# Altium PCB board.PcbDoc
Units mm, origin at the board's own origin, x right, y up, seen from the top; angles counter-clockwise.
Board outline 29 x 28 mm, 2 copper layers (Top Layer, Bottom Layer), stack 0.97 mm thick; 85 components, 60 nets, 216 pads, 58 vias.
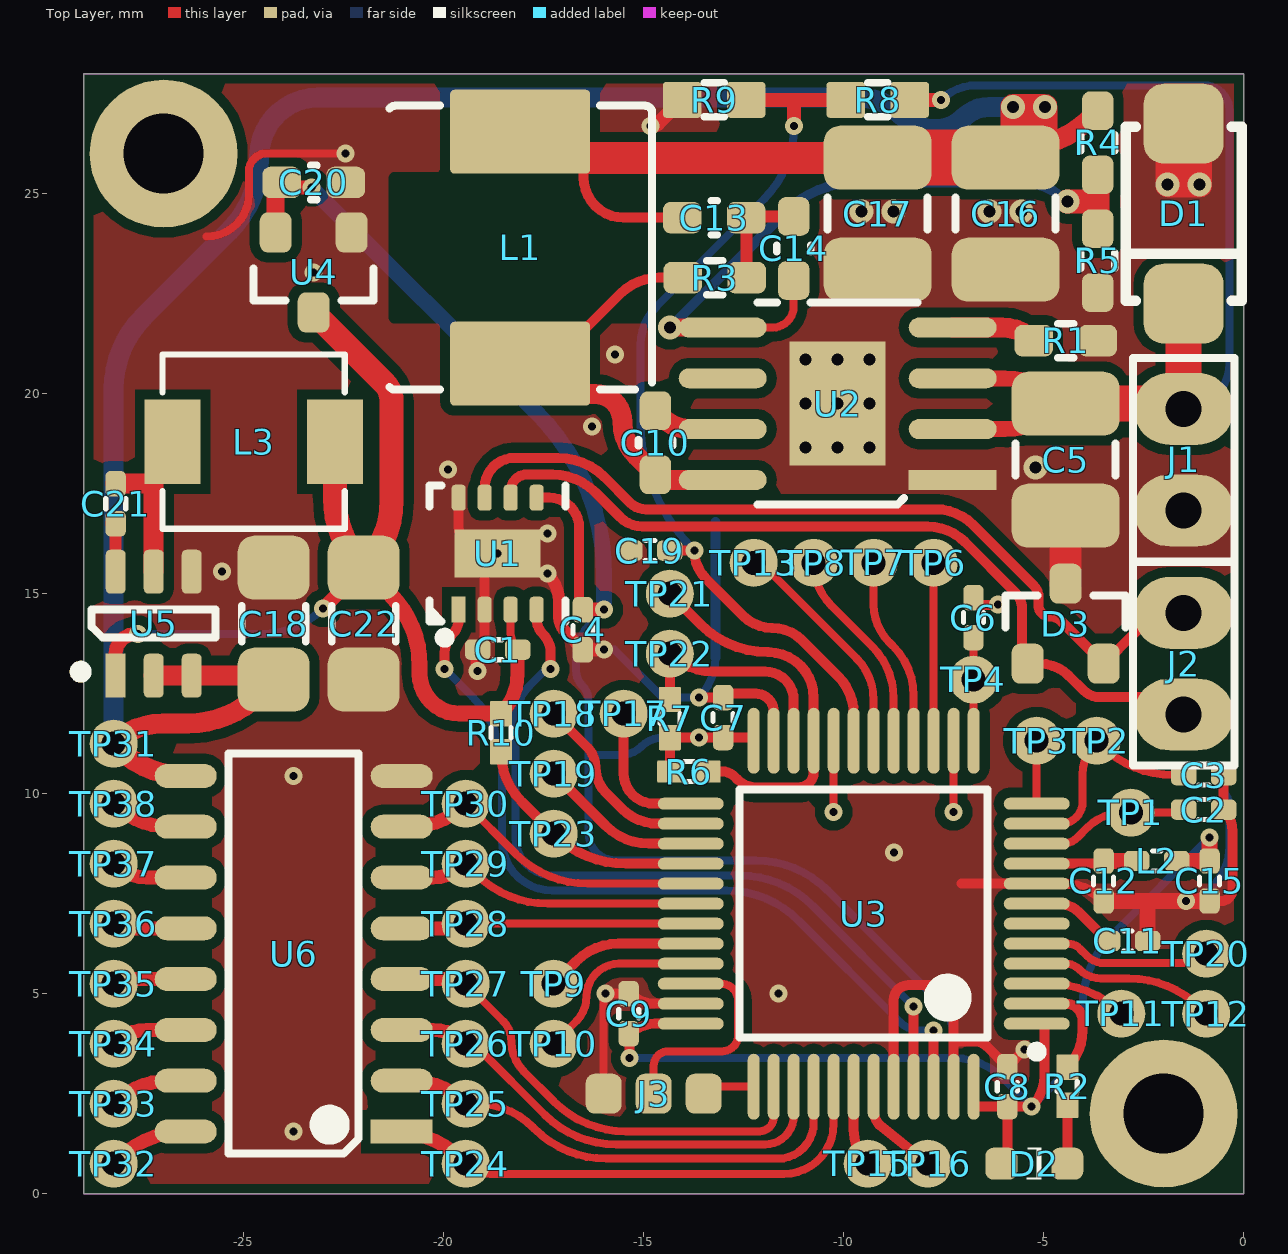
[diagram p0: Top Layer view]
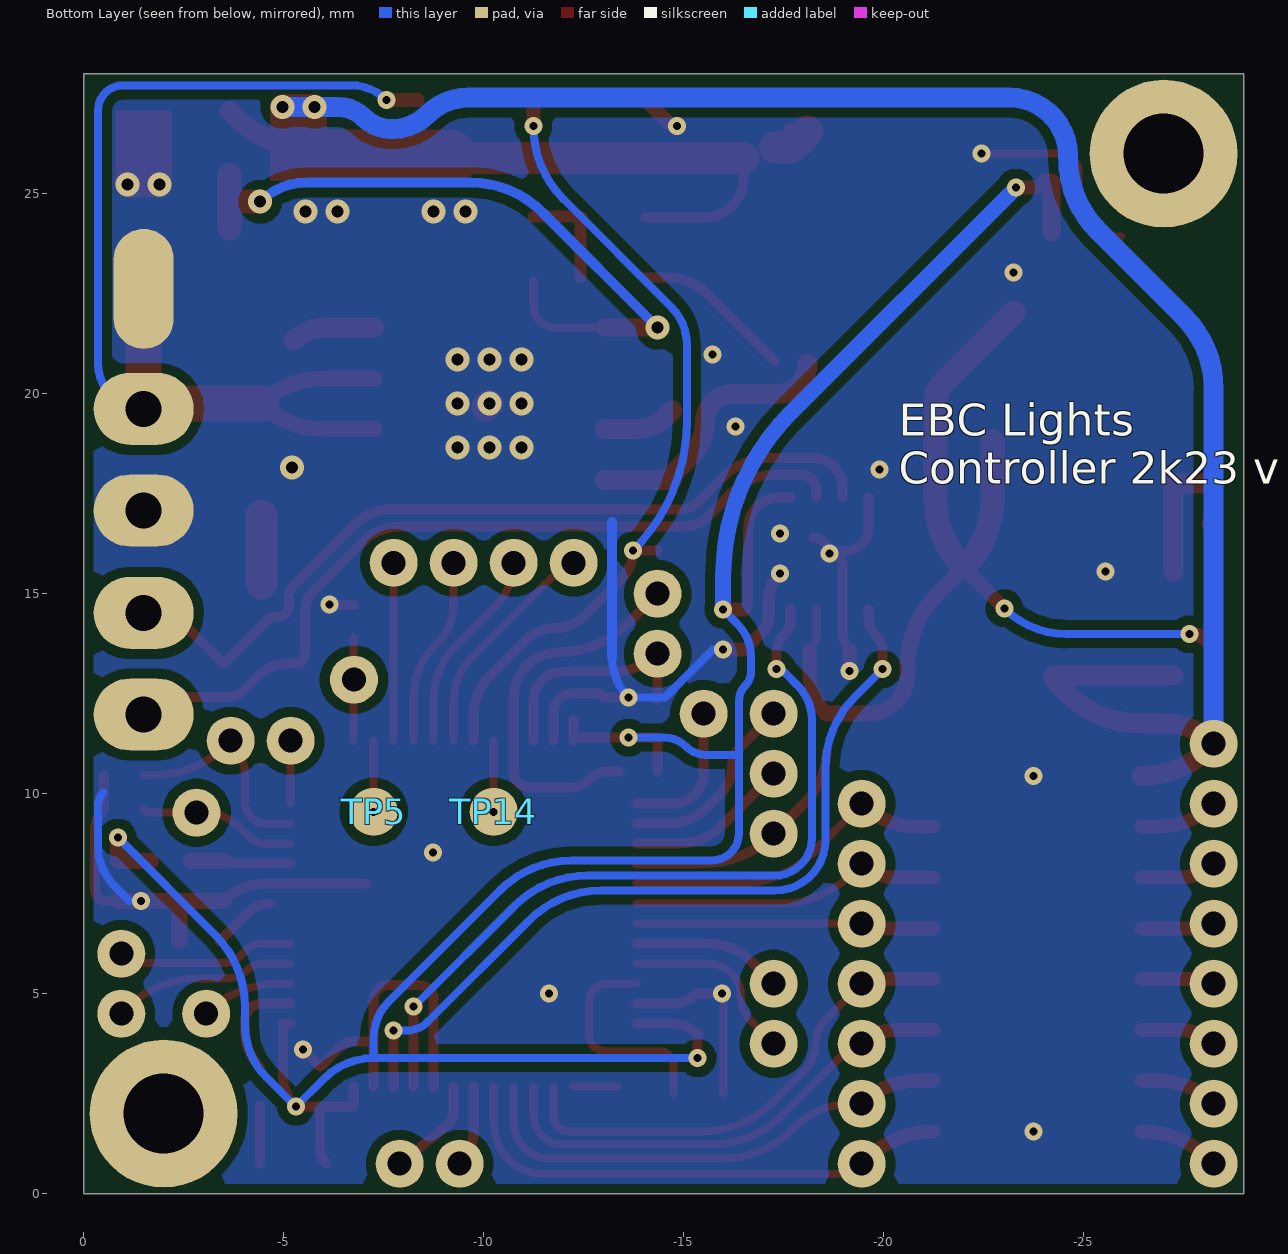
[diagram p1: Bottom Layer view, seen from below]
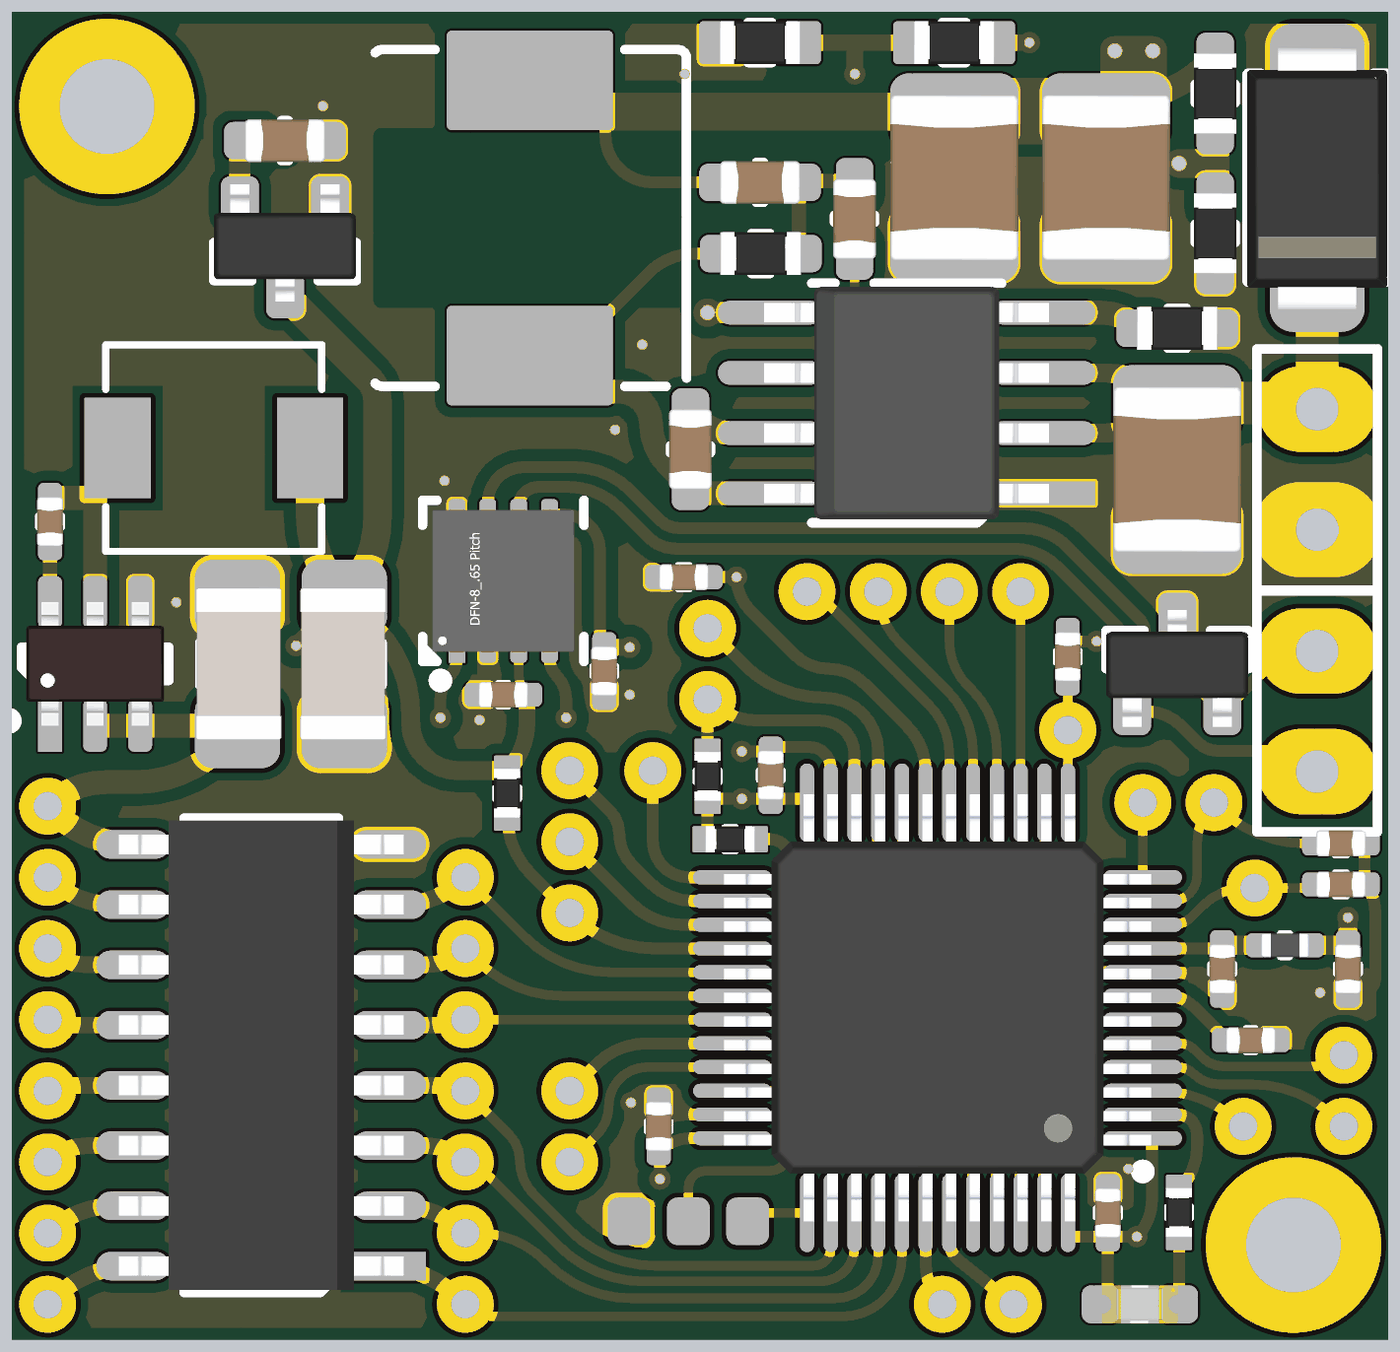
[diagram p2: 3D render of the assembled board from above, using the file's embedded part models]

## Layer stack, top to bottom
Top Solder: solder mask 0.0127, Solder Resist, Dk 3.8
Top Layer: signal copper 0.035
Dielectric: core 0.9, FR-4, Dk 4.5
Bottom Layer: signal copper 0.035
Bottom Solder: solder mask 0.0127, Solder Resist, Dk 3.8

## Board outline
-29,0 -29,28 0,28 0,0

## Design rules (kind name [scope] priority, off if disabled: settings)
AcuteAngle [All] p1: minimum=6.00000000000000E+0001 checktracksonly=FALSE
Clearance Clearance_1 [All] p1: gap=0.25 ignorepadtopadclearanceinfootprint=FALSE except(0.13: Arc-Arc Arc-Track Arc-SMDPad Arc-Via Track-Track Track-SMDPad Track-Via SMDPad-SMDPad SMDPad-Via THPad-Via Via-Via; 0.15: Arc-THPad Arc-Text Arc-Hole Track-THPad Track-Text Track-Hole SMDPad-THPad SMDPad-Text SMDPad-Hole THPad-THPad THPad-Text THPad-Hole Via-Text Via-Hole Fill-Text Fill-Hole Poly-Text Poly-Hole Region-Text Region-Hole Text-Text Text-Hole)
ComponentClearance [All] p1: gap=0.3 collisioncheckmode=3 verticalgap=0.254 showdistances=FALSE donotcheckwithout3dbody=TRUE
HoleSize [All] p1: absolutevalues=TRUE maxlimit=6 minlimit=0.2 maxpercent=80.000 minpercent=20.000
HoleToHoleClearance HoleToHoleClearance_1 [IsVia vs IsThruPin] p1: gap=0.7 allowstackedmicrovias=TRUE
HoleToHoleClearance [All] p2: gap=0.5 allowstackedmicrovias=TRUE
MinimumSolderMaskSliver [All] p1 off: minsoldermaskwidth=0.254
PlaneClearance [All] p1: clearance=0.45
PlaneConnect [All] p1: planeconnectstyle=Direct reliefexpansion=0.3 reliefentries=4 reliefconductorwidth=0.381 reliefairgap=0.178
PolygonConnect [All] p1: connectstyle=Direct reliefconductorwidth=0.381 reliefentries=4 polygonreliefangle="90 Angle" airgapwidth=0.356
RoutingVias [All] p1: holewidth=0.3 width=0.6 viastyle="Through Hole" minholewidth=0.2 minwidth=0.45 maxholewidth=0.9 maxwidth=1.27
SilkToSilkClearance [All] p1 off: silktosilkclearance=0.254
SilkToSolderMaskClearance [IsPad] p1 off: minsilkscreentomaskgap=0.254 clearancetoexposedcopper=TRUE
SolderMaskExpansion [All] p1: expansion=0.102 istentingtop=FALSE
UnRoutedNet [All] p1: checkbadconnections=TRUE
Width [All] p1: maxlimit=3.81 minlimit=0.14 preferedwidth=0.254
21 further rules are at their usual default settings.

## Components (designator, comment, footprint, x,y, rotation, side; value= is the part's Value field where it differs from the comment)
C1 "100nF" C0402 -18.65,13.6 r0 top
C2 "100nF" C0402 -1,9.601 r180 top
C3 "100nF" C0402 -1,10.465 r180 top
C4 "100nF" C0402 -16.522,14.1 r90 top
C5 "2u2" C1210 -4.45,18.35 r90 top
C6 "100nF" C0402 -6.756,14.402 r270 top
C7 "100nF" C0402 -13.013,11.904 r270 top
C8 "100nF" C0402 -5.911,2.675 r270 top
C9 "100nF" C0402 -15.375,4.5 r270 top
C10 "2.2nF" C0603 -14.706,18.775 r270 top
C11 "100nF" C0402 -2.9,6.319 r180 top
C12 "100nF" C0402 -3.502,7.819 r90 top
C13 "22n" C0603 -13.24,24.4 r180 top
C14 "56pF" C0603 -11.25,23.631 r90 top
C15 "100nF" C0402 -0.853,7.819 r90 top
C16 "22u" C1210 -5.95,24.5 r90 top
C17 "22u" C1210 -9.15,24.5 r90 top
C18 "10uF" C1206 -24.25,14.25 r270 top
C19 "100nF" C0402 -14.846,16.078 r0 top
C20 "10uF" C0603 -23.25,25.282 r180 top
C21 "100nF" C0402 -28.2,17.25 r90 top
C22 "10uF" C1206 -22,14.25 r90 top
D1 "58V" SMA -1.5,24.5 r270 top
D2 "GRN" LED-0603-GRN -5.236,0.75 r180 top
D3 "PESD2CAN" SOT-23 -4.45,14.25 r270 top
J1 "PWR" HDR-1X2 -1.5,18.35 r0 top
J2 "CAN" HDR-1X2 -1.5,13.25 r0 top
J3 "SWD" HDR-1x3-P1.25 -14.75,2.5 r180 top
L1 "68uH" L0605-POWER -18.089,23.65 r270 top
L2 "BEAD" L0402 -2.178,8.319 r180 top
L3 "4.7uH" IND-SMD_L4.4-W4.2 -24.75,18.8 r180 top
R1 "100k" R0603#1 -4.45,21.325 r0 top
R2 "470" R0402 -4.411,2.685 r90 top
R3 "237k" R0603#1 -13.225,22.9 r0 top
R4 "18k" R0603#1 -3.649,26.273 r270 top
R5 "101k" R0603#1 -3.649,23.327 r270 top
R6 "2k2" R0402 -13.87,10.555 r180 top
R7 "2k2" R0402 -14.346,11.88 r270 top
R8 "100k" R0603#2 -9.15,27.348 r0 top
R9 "3k" R0603#2 -13.24,27.348 r0 top
R10 "2k2" R0402 -18.567,11.524 r90 top
TP1 "" TP_THT#1 -2.819,9.525 r90 top
TP2 "" TP_THT#1 -3.675,11.325 r90 top
TP3 "" TP_THT#1 -5.175,11.325 r90 top
TP4 "" TP_THT#1 -6.756,12.852 r90 top
TP5 "" TP_THT#2 -7.25,9.547 r90 bottom
TP6 "" TP_THT#1 -7.75,15.773 r90 top
TP7 "" TP_THT#1 -9.25,15.773 r90 top
TP8 "" TP_THT#1 -10.75,15.773 r90 top
TP9 "" TP_THT#3 -17.263,5.426 r90 top
TP10 "" TP_THT#4 -17.212,3.775 r90 top
TP11 "" TP_THT#1 -3.061,4.5 r90 top
TP12 "" TP_THT#1 -0.939,4.5 r90 top
TP13 "" TP_THT#1 -12.25,15.773 r90 top
TP14 "" TP_THT#2 -10.25,9.547 r90 bottom
TP15 "" TP_THT#5 -9.386,0.818 r90 top
TP16 "" TP_THT#6 -7.811,0.844 r90 top
TP17 "" TP_THT#1 -15.5,12 r90 top
TP18 "" TP_THT#1 -17.25,12 r90 top
TP19 "" TP_THT#1 -17.25,10.5 r90 top
TP20 "" TP_THT#1 -0.939,6 r90 top
TP21 "" TP_THT#1 -14.346,15 r90 top
TP22 "" TP_THT#1 -14.346,13.5 r90 top
TP23 "" TP_THT#1 -17.25,9 r90 top
TP24 "" TP_THT#1 -19.45,0.75 r90 top
TP25 "" TP_THT#1 -19.45,2.25 r90 top
TP26 "" TP_THT#1 -19.45,3.75 r90 top
TP27 "" TP_THT#1 -19.45,5.25 r90 top
TP28 "" TP_THT#1 -19.45,6.75 r90 top
TP29 "" TP_THT#1 -19.45,8.25 r90 top
TP30 "" TP_THT#1 -19.45,9.75 r90 top
TP31 "" TP_THT#7 -28.25,10.917 r90 top
TP32 "" TP_THT#8 -28.25,1.798 r90 top
TP33 "" TP_THT#1 -28.25,2.25 r90 top
TP34 "" TP_THT#1 -28.25,3.75 r90 top
TP35 "" TP_THT#1 -28.25,5.25 r90 top
TP36 "" TP_THT#1 -28.25,6.75 r90 top
TP37 "" TP_THT#1 -28.25,8.25 r90 top
TP38 "" TP_THT#1 -28.25,9.75 r90 top
U1 "SIT1042QTK/3" DFN8_3X3_P065 -18.65,16 r90 top
U2 "LM5164" PowerSOIC-8 -10.15,19.75 r90 top
U3 "STM32F103CBT6" LQFP-48 -9.5,7 r180 top
U4 "XC6206P332MR" SOT-23 -23.25,23.032 r90 top
U5 "AP63205" SOT-23-6 -27.25,14.25 r0 top
U6 "ULN2003AA" SOIC-16 -23.75,6 r90 top

## Footprints (in the part's own frame and the unit in brackets; to place one, negate y for a bottom-side part, rotate by r counter-clockwise, add the part's x,y. Pads: shape width x height; smd on the part's side, far side on the other; paste and mask are expansions set on the pad)
C0402 [mm] "Chip Capacitor Body"
  rrect50% 0.635x0.508 smd mask+0.05: 1(-0.5,0) 2(0.5,0)
  silkscreen extent -0.1,-0.25 0.1,0.25, body extent -0.52,-0.27 0.53,0.28, height 0.55
C0603 [mil] "Chip Capacitor"
  rrect50% 38x31 smd mask+1.97: 1(-31.5,0) 2(31.5,0)
  silkscreen extent -3,-17 3,17, body extent -33,-18 33,18, height 35
C1206 [mm] "Chip Capacitor"
  rrect50% 1.6x1.8 smd: 1(-1.4,0) 2(1.4,0)
  silkscreen extent -0.45,-0.8 0.45,0.8, body extent -1.6,-0.88 1.6,0.92, height 1.6
C1210 [mm] "Chip Capacitor"
  rrect50% 1.6x2.7 smd mask+0.05: 1(-1.4,0) 2(1.4,0)
  silkscreen extent -0.4,-1.25 0.4,1.25, body extent -1.75,-1.35 1.75,1.35, height 1.8
DFN8_3X3_P065 [mm]
  rect 0.65x0.35 smd mask+0.05: 1(-1.4,0.975)
  rrect50% 0.65x0.35 smd mask+0.05: 2(-1.4,0.325) 3(-1.4,-0.325) 4(-1.4,-0.975) 5(1.4,-0.975) 6(1.4,-0.325) 7(1.4,0.325) 8(1.4,0.975)
  rect 1.2x2.15 smd mask+0.05: 9(0,0)
  silkscreen extent -2.22,-1.7 1.7,1.7, body extent -1.51,-1.5 1.51,1.5, height 0.8
HDR-1X2 [mm]
  oval 2.5x1.8 hole 0.9: 1(0,1.27) 2(0,-1.27)
  silkscreen extent -1.27,-2.54 1.27,2.54
HDR-1x3-P1.25 [mm]
  rrect50% 0.9x1 smd: 1(-1.25,0) 2(0,0) 3(1.25,0)
IND-SMD_L4.4-W4.2 [mm]
  rect 1.4x2.12 smd: 1(2.028,0) 2(-2.028,0)
  silkscreen extent -2.28,-2.18 2.28,2.18, body extent -2.28,-2.18 2.28,2.18, height 1.8
L0402 [mm] "Chip Inductor"
  rrect50% 0.635x0.508 smd mask+0.05: 1(-0.5,0) 2(0.5,0)
  silkscreen extent -0.1,-0.25 0.1,0.25, body extent -0.5,-0.25 0.5,0.25, height 0.5
L0605-POWER [mm]
  rrect10% 2.1x3.5 smd paste+0 mask+0.05: 1(2.9,0) 2(-2.9,0)
  Top Layer pour cut-out: -1.9,-3.122 -1.886,-3.19 -1.848,-3.248 -1.79,-3.286 -1.722,-3.3 -1.722,-3.3 1.722,-3.3 1.79,-3.286 1.848,-3.248 1.886,-3.19 1.9,-3.122 1.9,-3.122 1.9,3.122 1.886,3.19 1.848,3.248 1.79,3.286 1.722,3.3 1.722,3.3 -1.722,3.3 -1.79,3.286 -1.848,3.248 -1.886,3.19 -1.9,3.122 -1.9,3.122
  silkscreen extent -3.55,-3.26 3.55,3.3, body extent -3.55,-3.3 3.55,3.3, height 5
LED-0603-GRN [mm]
  rrect50% 0.8x0.8 smd mask+0.05: 1(0.825,0) 2(-0.825,0)
  silkscreen extent -0.18,-0.4 0.2,0.4, body extent -0.8,-0.4 0.8,0.4, height 0.6
LQFP-48 [mm]
  oval 1.65x0.3 smd: 1(-4.325,2.75) 2(-4.325,2.25) 3(-4.325,1.75) 4(-4.325,1.25) 5(-4.325,0.75) 6(-4.325,0.25) 7(-4.325,-0.25) 8(-4.325,-0.75) 9(-4.325,-1.25) 10(-4.325,-1.75) 11(-4.325,-2.25) 12(-4.325,-2.75) 25(4.325,-2.75) 26(4.325,-2.25) 27(4.325,-1.75) 28(4.325,-1.25) 29(4.325,-0.75) 30(4.325,-0.25) 31(4.325,0.25) 32(4.325,0.75) 33(4.325,1.25) 34(4.325,1.75) 35(4.325,2.25) 36(4.325,2.75)
  oval 0.3x1.65 smd: 13(-2.75,-4.325) 14(-2.25,-4.325) 15(-1.75,-4.325) 16(-1.25,-4.325) 17(-0.75,-4.325) 18(-0.25,-4.325) 19(0.25,-4.325) 20(0.75,-4.325) 21(1.25,-4.325) 22(1.75,-4.325) 23(2.25,-4.325) 24(2.75,-4.325) 37(2.75,4.325) 38(2.25,4.325) 39(1.75,4.325) 40(1.25,4.325) 41(0.75,4.325) 42(0.25,4.325) 43(-0.25,4.325) 44(-0.75,4.325) 45(-1.25,4.325) 46(-1.75,4.325) 47(-2.25,4.325) 48(-2.75,4.325)
  silkscreen extent -4.45,-3.1 3.1,3.57, body extent -4.5,-4.5 4.5,4.5, height 1.5
PowerSOIC-8 [mm]
  rect 0.5x2.2 smd mask+0.05: 1(-1.905,-2.875)
  oval 0.5x2.2 smd mask+0.05: 2(-0.635,-2.875) 3(0.635,-2.875) 4(1.905,-2.875) 5(1.905,2.875) 6(0.635,2.875) 7(-0.635,2.875) 8(-1.905,2.875)
  rect 3.1x2.4 smd mask+0.05: 9(0,0)
  silkscreen extent -2.52,-2 2.52,2, body extent -2.45,-3 2.45,3, height 1.68
R0402 [mm]
  rrect10% 0.635x0.55 smd mask+0.05: 1(-0.476,0) 2(0.476,0)
  silkscreen extent -0.12,-0.25 0.13,0.25, body extent -0.52,-0.27 0.53,0.28, height 0.4
R0603#1 [mil] "Chip Resistor; Body 1.6 x 0.8 mm (LxW typ)"
  rrect50% 38x31 smd mask+1.97: 1(-31.5,0) 2(31.5,0)
  silkscreen extent -8,-17 8,17, body extent -33,-18 33,18, height 22
R0603#2 [mil] "Chip Resistor; Body 1.6 x 0.8 mm (LxW typ)"
  rrect20% 38x35.43 smd mask+1.97: 1(-31.5,0) 2(31.5,0)
  silkscreen extent -10,-17 10,17, body extent -33,-18 33,18, height 22
SMA [mm] "SMA(DO-214AC)"
  rrect50% 2x2 smd: 1(-2.25,0) 2(2.25,0)
  silkscreen extent -2.17,-1.45 2.17,1.45, body extent -2.78,-1.48 2.83,1.48, height 2.9
SOIC-16 [mm]
  rect 0.6x1.55 smd mask+0.07: 1(-4.445,-2.7)
  oval 0.6x1.55 smd mask+0.07: 2(-3.175,-2.7) 3(-1.905,-2.7) 4(-0.635,-2.7) 5(0.635,-2.7) 6(1.905,-2.7) 7(3.175,-2.7) 8(4.445,-2.7) 9(4.445,2.7) 10(3.175,2.7) 11(1.905,2.7) 12(0.635,2.7) 13(-0.635,2.7) 14(-1.905,2.7) 15(-3.175,2.7) 16(-4.445,2.7)
  silkscreen extent -5,-1.63 5,1.62, body extent -4.95,-3 4.95,3, height 1.4
SOT-23 [mm]
  rrect50% 1x0.8 smd mask+0.05: 1(1,-0.95) 2(1,0.95) 3(-1,0)
  silkscreen extent -0.7,-1.5 0.1,1.5, body extent -1.27,-1.5 1.33,1.5, height 1.1
SOT-23-6 [mm]
  rect 0.5x1.1 smd mask+0.05: 1(-0.95,-1.3)
  rrect50% 0.5x1.1 smd mask+0.05: 2(0,-1.3) 3(0.95,-1.3) 4(0.95,1.3) 5(0,1.3) 6(-0.95,1.3)
  silkscreen extent -1.95,-1.32 1.55,0.35, body extent -1.45,-1.3 1.45,1.3, height 1.14
TP_THT#1 [mm]
  round 1.2 hole 0.6: 1(0,0)
TP_THT#2 [mm]
  round 1.2 smd: 1(0,0)
TP_THT#3 [mm]
  round 1.2 hole 0.6: 1(-0.176,-0.013)
TP_THT#4 [mm]
  round 1.2 hole 0.6: 1(-0.025,0.038)
TP_THT#5 [mm]
  round 1.2 hole 0.6: 1(-0.068,0.014)
TP_THT#6 [mm]
  round 1.2 hole 0.6: 1(-0.094,0.089)
TP_THT#7 [mm]
  round 1.2 hole 0.6: 1(0.333,0)
TP_THT#8 [mm]
  round 1.2 hole 0.6: 1(-1.048,0)

## Part data
C1 C2 C3 C4 C6 C7 C8 C9 C11 C12 C15 C19 C21: library part CAP, "100nF 50V 0402"
C5: library part CAP, "2.2uF 100V 1210"
C10: library part CAP, "2.2nF 50V 0603"
C13: library part CAP, "2.2nF 0603"
C14: library part CAP, "56pF 0603"
C16 C17: library part CAP, "22u 35V 1210"
C18 C22: library part CAP, "10uf 50V 1206", LCSC part number=C89632, P/N=CL31B106KBHNNNE
C20: library part CAP, "10uf 50V 1206"
D1: library part NCP51460SN33T1G, "SMAJ58A", LCSC part number=C693617, P/N=SMCJ24A
D2: library part LED-0603-GREEN, "LED 0603 GRN"
D3: library part CDSOT23-SM712, LCSC part number=C5261081, P/N=PESD2CAN
J1 J2: library part "Header 2"
J3: library part "Header 3"
L1: library part SRN3015-100M, "PSPMAA0605H-680M-IGF"
L2: library part BLM18AG601SN1D, "BEAD 0402"
L3: LCSC part number=C167208, P/N=FXL0420-4R7-M
R1: library part RES, "100k 0603"
R2: library part RES, "470 0603"
R3: library part RES, "237k 0603"
R4: library part RES, "18k 1% 0603"
R5: library part RES, "101k 0603"
R6 R7 R8 R9 R10: library part RES
TP1 TP2 TP3 TP4 TP5 TP6 TP7 TP8 TP9 TP10 TP11 TP12 TP13 TP14 TP15 TP16 TP17 TP18 TP19 TP20 TP21 TP22 TP23 TP24 TP25 TP26 TP27 TP28 TP29 TP30 TP31 TP32 TP33 TP34 TP35 TP36 TP37 TP38: library part TP_Dup1
U1: library part LTC2875, "IC INTERFACE CAN"
U4: library part Component_4_1
U5: library part AP63203WU-7, LCSC part number=C780769, P/N=AP63203WU-7
U6: library part ULN2003A

## Free pads (board coordinates)
  oval 1.5x3 smd far side: 2(-1.5,22.62)
  round 3.7 hole 2: M(-27,26) M(-2,2)

## Via types
v1: diameter 0.45, hole 0.2, Top Layer to Bottom Layer, tented both sides, 38 vias
v2: diameter 0.6, hole 0.3, Top Layer to Bottom Layer, tented both sides, 20 vias

## Nets (pads, with @x,y where several pads share a name; then routed paths per layer and width w, separated by ;. In a path a pad name is that pad's centre, name@x,y a point inside that pad or via, vN(x,y) a via of type N, cw(c..) or ccw(c..) an arc to the next point about the centre after c; other vN are vias at no path point)
1_MISO: TP7.1 U3.16 | length 4.7
  Top Layer w0.2: TP7.1 -9.25,14.723 ccw(c-7.934,14.723) -8.865,13.792 -8.766,13.693 ; -8.765,13.693 cw(c-10.01,12.449) -8.25,12.449 U3.16
1_MOSI: TP8.1 U3.17 | length 5.1
  Top Layer w0.2: TP8.1 ccw(c-9.231,15.773) -10.305,14.699 -9.293,13.687 cw(c-10.602,12.377) -8.75,12.377 U3.17
1_SCK: TP6.1 U3.15 | length 4.4
  Top Layer w0.2: U3.15@-7.75,11.325 TP6.1
2_MISO: TP19.1 U3.27 | length 4.1
  Top Layer w0.25: TP19.1 -15.95,9.2 ccw(c-14.865,10.285) -14.865,8.75 U3.27
2_MOSI: R10.1 TP23.1 U3.28 | length 6.1
  Top Layer w0.25: R10.1 ccw(c-16.804,11.048) -18.051,9.801 TP23.1 -17.244,8.994 ccw(c-15.448,10.79) -15.448,8.25 U3.28
2_SCK: TP18.1 U3.26 | length 4.8
  Top Layer w0.25: TP18.1 -16.408,11.158 cw(c-16.899,10.668) -16.205,10.668 ccw(c-15.285,10.668) -15.936,10.018 -15.545,9.627 ccw(c-14.637,10.535) -14.637,9.25 U3.26
3V3: C4.2 C7.2 C8.2 C9.2 C15.2 C20.2 D2.1 L2.1 R6.2 R7.2 U1.5 U3.1 U3.24 U3.36 U3.48 U4.2 | length 71.9
  Top Layer w0.25: U1.5 -17.366,17.4 cw(c-17.366,16.647) -16.613,16.647 -16.613,14.691 C4.2 ; C9.2 -15.325,4 cw(c-14.721,3.397) -14.721,4.25 U3.36 ; v1(-15.35,3.391) C9.2@-15.35,3.975 ; R6.2 R7.2 v1(-13.623,11.404) C7.2 U3.24@-12.25,11.404 ; U3.24 U3.24@-12.25,11.404 ; U3.24@-12.25,11.842 U3.24@-12.25,11.404 ; U3.48 -6.75,2.175 C8.2 ; D2.1 ccw(c-6.422,1.111) -5.911,1.111 C8.2 ; U3.1 -4.982,4.25 -4.982,2.946 cw(c-6.072,2.946) v1(-5.301,2.175) C8.2
  Top Layer w0.35: C20.2@-23.842,25.155 v1(-23.307,25.155) ; C4.2 v1(-15.987,14.6)
  Top Layer w0.4: L2.1@-1.677,8.319 C15.2 v1(-0.853,8.904)
  Top Layer w0.45: U4.2 -24.2,25.282 C20.2
  Bottom Layer w0.2: v1(-15.987,14.6) -16.343,14.244 ccw(c-15.51,13.411) -16.688,13.411 -16.688,13.071 ccw(c-16.167,13.071) -16.535,12.703 cw(c-16.903,12.335) -16.383,12.335 -16.383,10.975 ccw(c-16.38,10.975) -16.38,10.973 ; v1(-15.35,3.391) -7.25,3.391 ; v1@-13.647,11.463 cw(c-13.707,11.404) v1(-13.623,11.404) -14.511,11.404 ccw(c-14.511,10.625) -15.062,11.176 cw(c-15.553,11.667) -15.553,10.973 -16.38,10.973 ; -4.566,2.911 v1(-5.301,2.175) -5.998,2.872 ccw(c-7.25,1.62) -7.25,3.391 ; -4.566,2.911 ccw(c-5.861,4.206) -4.267,3.304 ccw(c-5.861,4.206) -4.03,4.206 -4.03,4.675 cw(c-1.49,4.675) -3.286,6.471 v1(-0.853,8.904) ; -16.38,10.973 -16.38,9.014 ccw(c-15.697,9.014) -15.697,8.331 -12.203,8.331 cw(c-12.203,5.791) -10.407,7.587 -7.625,4.806 cw(c-8.531,3.9) -7.25,3.9 -7.25,3.391
  Bottom Layer w0.4: v1(-23.307,25.155) -17.68,19.528 cw(c-21.767,15.441) -15.987,15.441 v1(-15.987,14.6)
5V: C1.2 C22.2 L3.2 R10.2 U1.3 U4.3 U5.1 | length 26.8
  Top Layer w0.2: U1.3 -18.325,14.022 ccw(c-17.728,14.022) C1.2
  Top Layer w0.35: U5.1 -28.2,13.507 cw(c-27.718,13.507) -27.718,13.989 v1(-27.641,13.989) ; v1(-23.016,14.634) C22.2 ; R10.2 ccw(c-19.575,13.008) -18.15,13.008 C1.2
  Top Layer w0.4: C22.2 -21.344,14.994 cw(c-23.14,13.198) -20.6,13.198 -20.6,13 ccw(c-19.6,13) -19.6,12 R10.2
  Top Layer w0.6: U4.3 -21.499,20.281 cw(c-21.98,19.8) -21.3,19.8 -21.3,17.34 cw(c-23.69,17.34) C22.2 cw(c-20.257,17.393) -22.722,17.393 L3.2
  Bottom Layer w0.2: v1(-27.641,13.989) -24.573,13.989 ccw(c-24.573,16.191) v1(-23.016,14.634)
12V: C13.2 C16.2 C17.2 C18.2 L1.2 R4.1 TP31.1 U5.2 U5.3 U6.9 | length 65.4
  Top Layer w0.25: L1.2 L1.2@-18.015,26.55 ; L1.2@-17.682,26.638 L1.2@-17.649,26.638 ; L1.2@-16.5,25.892 -16.5,25.4 ccw(c-15.5,25.4) -15.5,24.4 C13.2
  Top Layer w0.5: TP31.1 cw(c-27.023,10.023) -27.023,11.758 -26.394,11.758 ccw(c-26.394,14.298) -24.598,12.502 C18.2 -24.25,12.95 U5.3 U5.2 ; TP31.1@-28.149,11.149 ccw(c-26.45,12.847) U6.9 ; C16.2@-5.95,26.15 -5.625,26.15 ccw(c-5.625,28.69) -3.829,26.894 R4.1
  Top Layer w0.8: L1.2@-16.5,25.892 -9.407,25.892 C17.2@-9.15,26.15 ; L1.2 -17.689,26.15 -17.279,26.15 cw(c-17.279,27.141) L1.2@-17.874,26.349 ; L1.2 -17.888,26.349 L1.2@-17.874,26.349 ; L1.2 -17.979,26.44 ccw(c-17.279,27.141) L1.2@-17.874,26.349
  Top Layer w1.4: C17.2 C16.2
  Bottom Layer w0.5: TP31.1 -28.25,20.126 cw(c-25.71,20.126) -27.506,21.922 -25.357,24.072 ccw(c-27.153,25.868) -24.613,25.868 -24.613,25.933 cw(c-23.139,25.933) -23.139,27.407 -9.631,27.407 cw(c-9.631,25.914) -8.576,26.97 ccw(c-7.73,27.815) -7.73,26.619 -7.685,26.619 ccw(c-7.685,27.573) -7.01,26.899 cw(c-6.349,26.238) -6.349,27.172 v2(-5.765,27.172) v2(-4.965,27.172)
_NC0: TP11.1 U3.3 | length 2.3
  Top Layer w0.2: U3.3 -4.863,5.25 cw(c-4.863,2.71) -3.067,4.506 TP11.1
_NC1: TP12.1 U3.4 | length 4.6
  Top Layer w0.2: U3.4 -4.446,5.75 cw(c-4.446,5.283) -4.115,5.613 ccw(c-3.563,6.165) -3.563,5.385 -2.876,5.385 cw(c-2.876,2.845) -1.08,4.641 TP12.1
_NC2: TP14.1 U3.20 | length 1.8
  Top Layer w0.2: v1(-10.25,9.547) U3.20
_NC3: TP17.1 U3.25 | length 3.6
  Top Layer w0.25: TP17.1 -15.5,10.512 ccw(c-14.738,10.512) -14.738,9.75 U3.25
_NC4: TP20.1 U3.5 | length 4.5
  Top Layer w0.2: U3.5 -4.401,6.25 cw(c-4.401,5.81) -4.089,6.121 -3.913,5.945 ccw(c-3.48,6.379) -3.48,5.766 -1.505,5.766 ccw(c-1.505,6.565) TP20.1
ADC_0: C2.2 TP1.1 U3.10 | length 3.9
  Top Layer w0.2: U3.10 -4.531,8.75 ccw(c-4.531,9.278) -4.158,8.905 -3.903,9.16 cw(c-3.023,8.28) -3.023,9.525 TP1.1 -1.684,9.525 ccw(c-1.684,9.785) C2.2
ADC_1: C3.2 TP2.1 U3.11 | length 5.5
  Top Layer w0.2: U3.11 -4.57,9.25 ccw(c-4.57,9.791) -4.03,9.791 -4.03,10.469 cw(c-2.818,10.469) TP2.1 -3.558,11.209 ccw(c-1.762,13.005) -1.762,10.465 C3.2
ADC_2: TP3.1 U3.12 | length 1.6
  Top Layer w0.2: U3.12 TP3.1
ADC_3: C6.2 TP4.1 U3.13 | length 2.6
  Top Layer w0.2: U3.13 C6.2@-6.75,13.902
ADC_4: TP5.1 U3.14 | length 1.8
  Top Layer w0.2: v1(-7.25,9.547) U3.14
B_SENS: C19.2 R8.1 R9.2 U3.19 | length 22.9
  Top Layer w0.25: C19.2 -13.736,16.078 ccw(c-12.738,16.079) -13.444,15.374 -12.517,14.447 ccw(c-11.794,15.171) -11.794,14.148 cw(c-11.794,13.086) -11.043,13.837 -10.141,12.935 cw(c-11.084,11.992) -9.75,11.992 U3.19
  Top Layer w0.35: R9.2 -11.243,27.348 ; v1(-11.243,26.687) -11.243,27.348 ; R8.1 -11.243,27.348
  Bottom Layer w0.2: v1(-13.736,16.079) cw(c-10.49,19.325) -15.08,19.325 -15.08,21.22 cw(c-13.73,21.22) -15.08,21.223 cw(c-13.73,21.22) -14.685,22.174 -11.987,24.872 ccw(c-13.783,26.668) -11.243,26.668 v1(-11.243,26.687)
CAN_H: D3.2 J2.1 U1.7 | length 20.8
  Top Layer w0.25: U1.7 -18.975,17.651 cw(c-18.228,17.651) -18.228,18.398 -17.148,18.398 cw(c-17.148,16.75) -15.983,17.916 -15.342,17.275 ccw(c-14.947,17.67) -14.947,17.112 -7.703,17.112 cw(c-7.703,15.788) -6.767,16.724 -5.257,15.213 ; -5.256,15.213 cw(c-5.56,14.91) -5.131,14.91 -5.131,14.715 ccw(c-4.848,14.715) -4.848,14.432 cw(c-4.848,14.03) -4.563,14.314 D3.2 -2.745,14.004 cw(c-1.5,12.759) J2.1
CAN_L: D3.1 J2.2 U1.6 | length 20.2
  Top Layer w0.25: U1.6 -18.325,17.572 cw(c-17.915,17.572) -17.915,17.982 -17.286,17.982 cw(c-17.286,16.463) -16.213,17.538 ; -16.212,17.537 -15.588,16.912 ccw(c-15.026,17.474) -15.026,16.679 -7.906,16.679 cw(c-7.906,15.356) -6.97,16.292 -5.717,15.039 cw(c-6.15,14.605) -5.537,14.605 -5.537,13.582 ccw(c-5.067,13.582) D3.1 -5.1,13.25 cw(c-5.1,12.212) -4.366,12.946 -4.005,12.584 ccw(c-3.599,12.99) -3.599,12.416 -2.553,12.416 cw(c-2.553,10.927) J2.2
CAN_RX: U1.4 U3.45 | length 19.9
  Top Layer w0.25: U1.4 -17.675,14.362 ccw(c-17.163,14.362) -17.525,14 cw(c-18.008,13.517) -17.325,13.517 v1(-17.325,13.116) ; U3.45 v1(-8.25,4.675) v1@-8.25,4.69
  Bottom Layer w0.2: v1(-17.325,13.116) ccw(c-17.325,12.845) -17.516,13.037 -17.848,12.705 ccw(c-16.979,11.836) -18.208,11.836 -18.208,8.9 ccw(c-17.258,8.9) -17.258,7.95 -12.577,7.95 cw(c-12.577,5.41) -10.781,7.206 v1(-8.25,4.675)
CAN_TX: U1.1 U3.46 | length 20.6
  Top Layer w0.25: v1(-19.975,13.116) -19.975,13.517 cw(c-19.292,13.517) -19.775,14 ccw(c-20.137,14.362) -19.625,14.362 U1.1 ; U3.46 v1(-7.75,4.075)
  Bottom Layer w0.2: v1(-19.975,13.116) -19.283,12.424 cw(c-21.079,10.628) -18.539,10.628 -18.539,8.836 ccw(c-17.28,8.836) -17.28,7.577 -12.929,7.577 cw(c-12.929,5.037) -11.133,6.833 -8.6,4.3 ccw(c-8.058,4.842) -8.058,4.075 v1(-7.75,4.075)
DM: TP9.1 U3.32 | length 3.8
  Top Layer w0.25: TP9.1 -16.686,5.814 cw(c-15.633,4.761) -15.633,6.25 U3.32
DP: TP10.1 U3.33 | length 4.6
  Top Layer w0.2: TP10.1 -16.686,4.314 ccw(c-17.314,4.941) -16.427,4.941 cw(c-15.617,4.941) -16.388,5.187 cw(c-15.617,4.941) -15.617,5.75 U3.33
GND: C1.1 C2.1 C3.1 C4.1 C5.1 C6.1 C7.1 C8.1 C9.1 C11.1 C12.1 C15.1 C16.1 C17.1 C18.1 C19.1 C20.1 C22.1 D1.1 D3.3 J1.2 J3.3 pad.2 R1.2 R5.2 R9.1 U1.2 U1.8 U1.9 U2.1 U2.9 U3.8 U3.23 U3.35 U3.44 U3.47 U4.1 U5.4 U6.8 | length 54.6
  Top Layer w0.2: -25.933,23.927 ccw(c-25.933,24.991) -24.869,24.991 -24.869,25.568 cw(c-24.428,25.568) -24.428,26.01 v1(-22.45,26.01) ; J3.3 -16,4.903 cw(c-15.862,4.903) v1(-15.96,5)
  Top Layer w0.25: U1.8 -19.625,16.668 ccw(c-19.018,16.668) -19.018,16.061 -18.711,16.061 cw(c-18.711,16) v1(-18.65,16) ; C1.1 ccw(c-19.572,14.022) -18.975,14.022 U1.2 -18.975,15.675 cw(c-18.65,15.675) v1(-18.65,16) ; U1.9@-18.25,16.4 ccw(c-18.25,16) v1(-18.65,16) ; v1(-15.96,5) C9.1 -15.325,5 ccw(c-14.721,5.604) -14.721,4.75 U3.35 ; v1(-13.623,12.404) C7.1 -12.917,12.5 -12.197,12.5 cw(c-12.197,12.054) -11.75,12.054 U3.23 ; U3.44 -8.75,4.843 cw(c-8.381,4.843) -8.381,5.213 -7.608,5.213 cw(c-7.608,4.854) -7.25,4.854 -7.25,3.809 ; U3.47 -7.25,3.809 ; -7.061,7.75 U3.8 U3.8@-4.544,7.75 ; C6.1@-6.756,14.724 v1@-6.147,14.724 ; -6.417,3.682 C8.1 v1(-5.48,3.607) ; -6.418,3.682 ccw(c-6.724,3.375) -6.724,3.809 -7.25,3.809 ; U3.8@-4.442,7.75 U3.8@-4.544,7.75 ; C12.1 ccw(c-4.544,6.276) U3.8@-4.544,7.75 ; C15.1 -0.566,7.319 ccw(c-0.566,7.606) -0.279,7.606 -0.279,9.069 ccw(c-1.033,9.069) C2.1 C3.1
  Top Layer w0.3: v1(-17.404,15.5) cw(c-18.096,14.809) -17.118,14.809 -17.118,14.471 ccw(c-16.471,14.471) -17.077,14.244 ccw(c-16.471,14.471) -16.928,14.013 -16.522,13.607 C4.1
  Top Layer w0.35: v1(-19.15,13.065) C1.1 ; C4.1 v1(-15.987,13.6) ; v1(-14.826,26.687) ccw(c-14.826,26.988) -14.613,26.775 R9.1
  Top Layer w0.4: C12.1 -2.502,7.319 ; -2.502,7.319 v1(-1.438,7.319) C15.1 ; C11.1 -2.4,7.319
  Top Layer w0.7: v2(-10.15,19.75) cw(c-10.15,19.65) U2.9@-10.049,19.65
  Top Layer w0.8: D3.3 C5.1
  Bottom Layer w0.2: v1(-15.987,13.6) -15.729,13.6 -14.534,12.404 v1(-13.623,12.404) ccw(c-14.625,13.406) -13.208,13.406 ; -1.145,7.319 -0.772,7.692 ccw(c-1.787,8.707) -0.352,8.707 -0.352,9.676 ccw(c-0.857,9.676) -0.5,10.033
  Bottom Layer w0.25: -13.208,13.406 -13.208,16.789
  other v1: -23.75,1.555 -11.633,5 -8.738,8.534 -23.75,10.445 -6.147,14.725 -25.538,15.55 -17.404,16.5 -19.888,18.11 -16.293,19.186 -15.723,20.98 -23.25,23.032
  other v2: -5.212,18.15 -10.95,18.65 -10.15,18.65 -9.35,18.65 -10.95,19.75 -9.35,19.75 -10.95,20.85 -10.15,20.85 -9.35,20.85 -9.55,24.55 -8.75,24.55 -6.35,24.55 -5.55,24.55 -1.9,25.226 -1.1,25.226
NetC10_1: C10.1 U2.7 | length 1.8
  Top Layer w0.5: C10.1 -14.536,19.405 ccw(c-13.836,20.106) -13.836,19.115 U2.7
NetC10_2: C10.2 L1.1 R3.1 U2.8 | length 10.7
  Top Layer w0.25: L1.1@-17.274,20.812 -15.59,22.495 cw(c-14.612,21.518) -14.612,22.9 R3.1
  Top Layer w0.5: L1.1 ccw(c-17.331,20.75) -17.331,19.992 -16.213,19.992 cw(c-16.213,19.315) -15.536,19.315 ccw(c-14.306,19.315) -15.176,18.445 C10.2 ; C10.2@-14.706,17.845 U2.8
NetC11_2: C11.2 U3.7 | length 1.6
  Top Layer w0.25: U3.7@-4.643,7.25 cw(c-4.643,6.5) -4.112,7.031 ; -4.112,7.03 C11.2
NetC12_2: C12.2 L2.2 U3.9 | length 2.6
  Top Layer w0.25: U3.9 C12.2@-3.565,8.25 ; C12.2@-3.667,8.25 ccw(c-3.667,8.484) C12.2
  Top Layer w0.4: C12.2 L2.2
NetC13_1: C13.1 C14.2 R3.2 | length 2.7
  Top Layer w0.3: C13.1 cw(c-12.479,24.362) C13.1@-12.424,24.362 ; R3.2 C13.1@-12.424,24.362 ; C14.2 -12.355,24.431 ccw(c-12.355,24.362) C13.1@-12.424,24.362
NetC14_1: C14.1 R4.2 R5.1 U2.5 | length 17.6
  Top Layer w0.2: U2.5 -11.776,21.655 ccw(c-11.776,22.182) -11.25,22.182 C14.1
  Top Layer w0.45: v2(-14.345,21.655) U2.5
  Top Layer w0.6: v2(-4.411,24.8) -3.649,24.8 ; R5.1 R4.2
  Bottom Layer w0.25: v2(-14.345,21.655) -11.462,24.539 cw(c-9.666,22.743) -9.666,25.283 -5.577,25.283 cw(c-5.577,23.635) v2(-4.411,24.8)
NetC21_1: C21.1 U5.6 | length 1.2
  Top Layer w0.3: U5.6 C21.1
NetC21_2: C21.2 L3.1 U5.5 | length 3.2
  Top Layer w0.5: C21.2 -27.25,17.75 U5.5
NetD2_2: D2.2 R2.1 | length 1.5
  Top Layer w0.25: D2.2 R2.1
NetR1_1: R1.1 U2.4 | length 2.1
  Top Layer w0.5: U2.4 -6.047,21.655 cw(c-6.047,20.528) R1.1
NetR2_2: R2.2 U3.2 | length 2.7
  Top Layer w0.25: U3.2 -4.45,4.75 cw(c-4.45,4.33) -4.03,4.33 -4.03,4.081 cw(c-5.331,4.081) R2.2
NetTP32_1: TP32.1 U6.16 | length 2.4
  Top Layer w0.2: TP32.1@-28.506,0.494 ccw(c-28.506,0.75) TP32.1
  Top Layer w0.35: TP32.1 -28.149,0.851 cw(c-26.45,-0.847) U6.16
NetTP33_1: TP33.1 U6.15 | length 2
  Top Layer w0.35: TP33.1 cw(c-26.862,0.862) -26.862,2.825 U6.15
NetTP34_1: TP34.1 U6.14 | length 1.9
  Top Layer w0.35: TP34.1 cw(c-27.417,2.917) -27.417,4.095 U6.14
NetTP35_1: TP35.1 U6.13 | length 1.8
  Top Layer w0.35: TP35.1 cw(c-27.972,4.972) -27.972,5.365 U6.13
NetTP36_1: TP36.1 U6.12 | length 1.8
  Top Layer w0.35: TP36.1 ccw(c-27.972,7.028) -27.972,6.635 U6.12
NetTP37_1: TP37.1 U6.11 | length 1.9
  Top Layer w0.35: TP37.1 ccw(c-27.417,9.083) -27.417,7.905 U6.11
NetTP38_1: TP38.1 U6.10 | length 2
  Top Layer w0.35: TP38.1 ccw(c-26.862,11.138) -26.862,9.175 U6.10
RX: TP16.1 U3.43 | length 2.5
  Top Layer w0.25: U3.43 -9.25,2.083 ccw(c-8.729,2.083) -9.028,1.655 TP16.1
SCL: R6.1 TP21.1 U3.21 | length 9.6
  Top Layer w0.25: TP21.1 -13.588,14.243 ccw(c-11.887,15.944) -11.887,13.538 cw(c-11.887,12.401) -10.75,12.401 U3.21 -10.75,10.535 cw(c-11.125,10.535) -11.125,10.16 -12.192,10.16 cw(c-12.192,10.809) -12.651,10.35 -12.728,10.428 ccw(c-13.036,10.12) -13.036,10.555 R6.1
SDA: R7.1 TP22.1 U3.22 | length 5.3
  Top Layer w0.25: R7.1 TP22.1@-14.346,13.056 ; TP22.1 ccw(c-13.273,14.573) -13.273,13.056 -11.963,13.056 cw(c-11.963,12.342) -11.25,12.342 U3.22
SWCLK: J3.1 U3.37 | length 1.1
  Top Layer w0.2: J3.1@-13.349,2.675 U3.37
SWDIO: J3.2 U3.34 | length 5.5
  Top Layer w0.2: J3.2 -14.75,3.201 cw(c-14.39,3.201) -14.39,3.561 -13.038,3.561 ccw(c-13.038,3.962) -12.637,3.962 -12.637,4.816 ccw(c-13.072,4.816) -13.072,5.25 U3.34
T1_1: TP30.1 U3.29 U6.7 | length 8.3
  Top Layer w0.2: TP30.1 -18.194,8.494 ccw(c-16.398,10.29) -16.398,7.75 U3.29
  Top Layer w0.35: U6.7@-21.25,9.175 -20.838,9.175 ccw(c-20.838,11.138) TP30.1
T1_2: TP29.1 U3.30 U6.6 | length 7.8
  Top Layer w0.2: TP29.1 -19.194,7.994 ccw(c-17.398,9.79) -17.398,7.25 U3.30
  Top Layer w0.35: U6.6@-21.25,7.905 -20.283,7.905 ccw(c-20.283,9.083) TP29.1
T1_3: TP28.1 U3.31 U6.5 | length 7.5
  Top Layer w0.2: TP28.1 U3.31
  Top Layer w0.35: U6.5@-21.25,6.635 U6.5 -19.728,6.635 ccw(c-19.728,7.028) TP28.1
T2_1: TP27.1 U3.38 U6.4 | length 12.3
  Top Layer w0.2: TP27.1 -18.523,4.323 cw(c-19.049,3.796) -18.305,3.796 ccw(c-17.262,3.796) -17.999,3.059 -17.245,2.305 ccw(c-15.449,4.101) -15.449,1.561 -12.101,1.561 ccw(c-12.101,1.912) -11.75,1.912 U3.38
  Top Layer w0.35: U6.4@-21.25,5.365 -19.728,5.365 cw(c-19.728,4.972) TP27.1
T2_2: TP26.1 U3.39 U6.3 | length 12.1
  Top Layer w0.2: TP26.1 cw(c-19.45,3.267) -19.109,3.609 -17.475,1.975 ccw(c-15.679,3.771) -15.679,1.231 -11.972,1.231 ccw(c-11.972,1.953) -11.25,1.953 U3.39
  Top Layer w0.35: U6.3@-21.25,4.095 -20.283,4.095 cw(c-20.283,2.917) TP26.1
T3_1: TP25.1 U3.40 U6.2 | length 12.4
  Top Layer w0.2: TP25.1 -19.189,2.25 cw(c-19.189,0.245) -17.771,1.663 -17.728,1.619 ccw(c-15.932,3.415) -15.932,0.875 -11.65,0.875 ccw(c-11.65,1.775) -10.75,1.775 U3.40
  Top Layer w0.35: U6.2@-21.25,2.825 -20.838,2.825 cw(c-20.838,0.862) TP25.1
T3_2: TP24.1 U3.41 U6.1 | length 12.9
  Top Layer w0.2: TP24.1 ccw(c-18.833,1.367) -18.833,0.494 -11.5,0.494 ccw(c-11.5,1.744) -10.25,1.744 U3.41
  Top Layer w0.35: U6.1@-21.25,1.555 cw(c-21.25,-0.847) -19.551,0.851 TP24.1
T3_3: TP13.1 U3.18 | length 6.2
  Top Layer w0.2: TP13.1@-12.457,15.773 -12.457,15.584 TP13.1@-12.268,15.773 ; TP13.1 cw(c-12.25,15.331) -11.938,15.644 -9.686,13.392 cw(c-10.738,12.341) -9.25,12.341 U3.18
TX: TP15.1 U3.42 | length 2
  Top Layer w0.25: U3.42 -9.75,1.595 ccw(c-8.555,1.595) TP15.1
Vb: C5.2 D1.2 J1.1 R8.2 U2.2 U2.3 | length 28.2
  Top Layer w0.35: R8.2 v1(-7.564,27.348)
  Top Layer w0.4: U2.2 -5.983,19.115 ccw(c-5.983,21.283) -4.452,19.748 ccw(c-5.983,21.283) C5.2 ; U2.3 -5.983,20.385 cw(c-5.983,18.217) C5.2@-4.452,19.752
  Top Layer w0.9: C5.2 -1.814,19.75 cw(c-1.814,19.306) J1.1 D1.2
  Bottom Layer w0.2: v1(-7.564,27.348) cw(c-6.686,26.469) -6.686,27.711 -0.991,27.711 cw(c-0.991,27.076) -0.356,27.076 -0.356,20.765 cw(c-1.5,20.765) J1.1
pads on no net: U2.6 U3.6

## Polygon pours and split planes (outlines as drawn)
GND on Top Layer "NONET_L02_P-001" (solid, remove dead copper, pour order 0): -29,28 -29,0 0,0 0,28
GND on Bottom Layer "NONET_L02_P-001" (solid, remove dead copper, pour order 1): -29,28 -29,0 0,0 0,28

## Keep-outs
Keep-Out Layer:
  the board outline again, w0

## Other copper
Top Layer:
  region net GND: -2.2,25.207 ccw(c-1.909,25.207) -1.909,24.916 -1.081,24.916 ccw(c-1.081,25.204) -0.793,25.204 -0.793,27.076 -2.2,27.076
  region net 12V: -4.665,27.192 ccw(c-4.956,27.192) -4.957,27.483 -5.784,27.483 ccw(c-5.784,27.194) -6.072,27.194 -6.072,25.322 -4.665,25.322

## Silkscreen, mask and mechanical layers (free items; w line width, h text height)
Bottom Overlay:
  text "EBC Lights / Controller 2k23 v1.0.0" at -20.371,17.755 h0.8